# EAGLE board Proiect v104 (EAGLE 9.7.0)
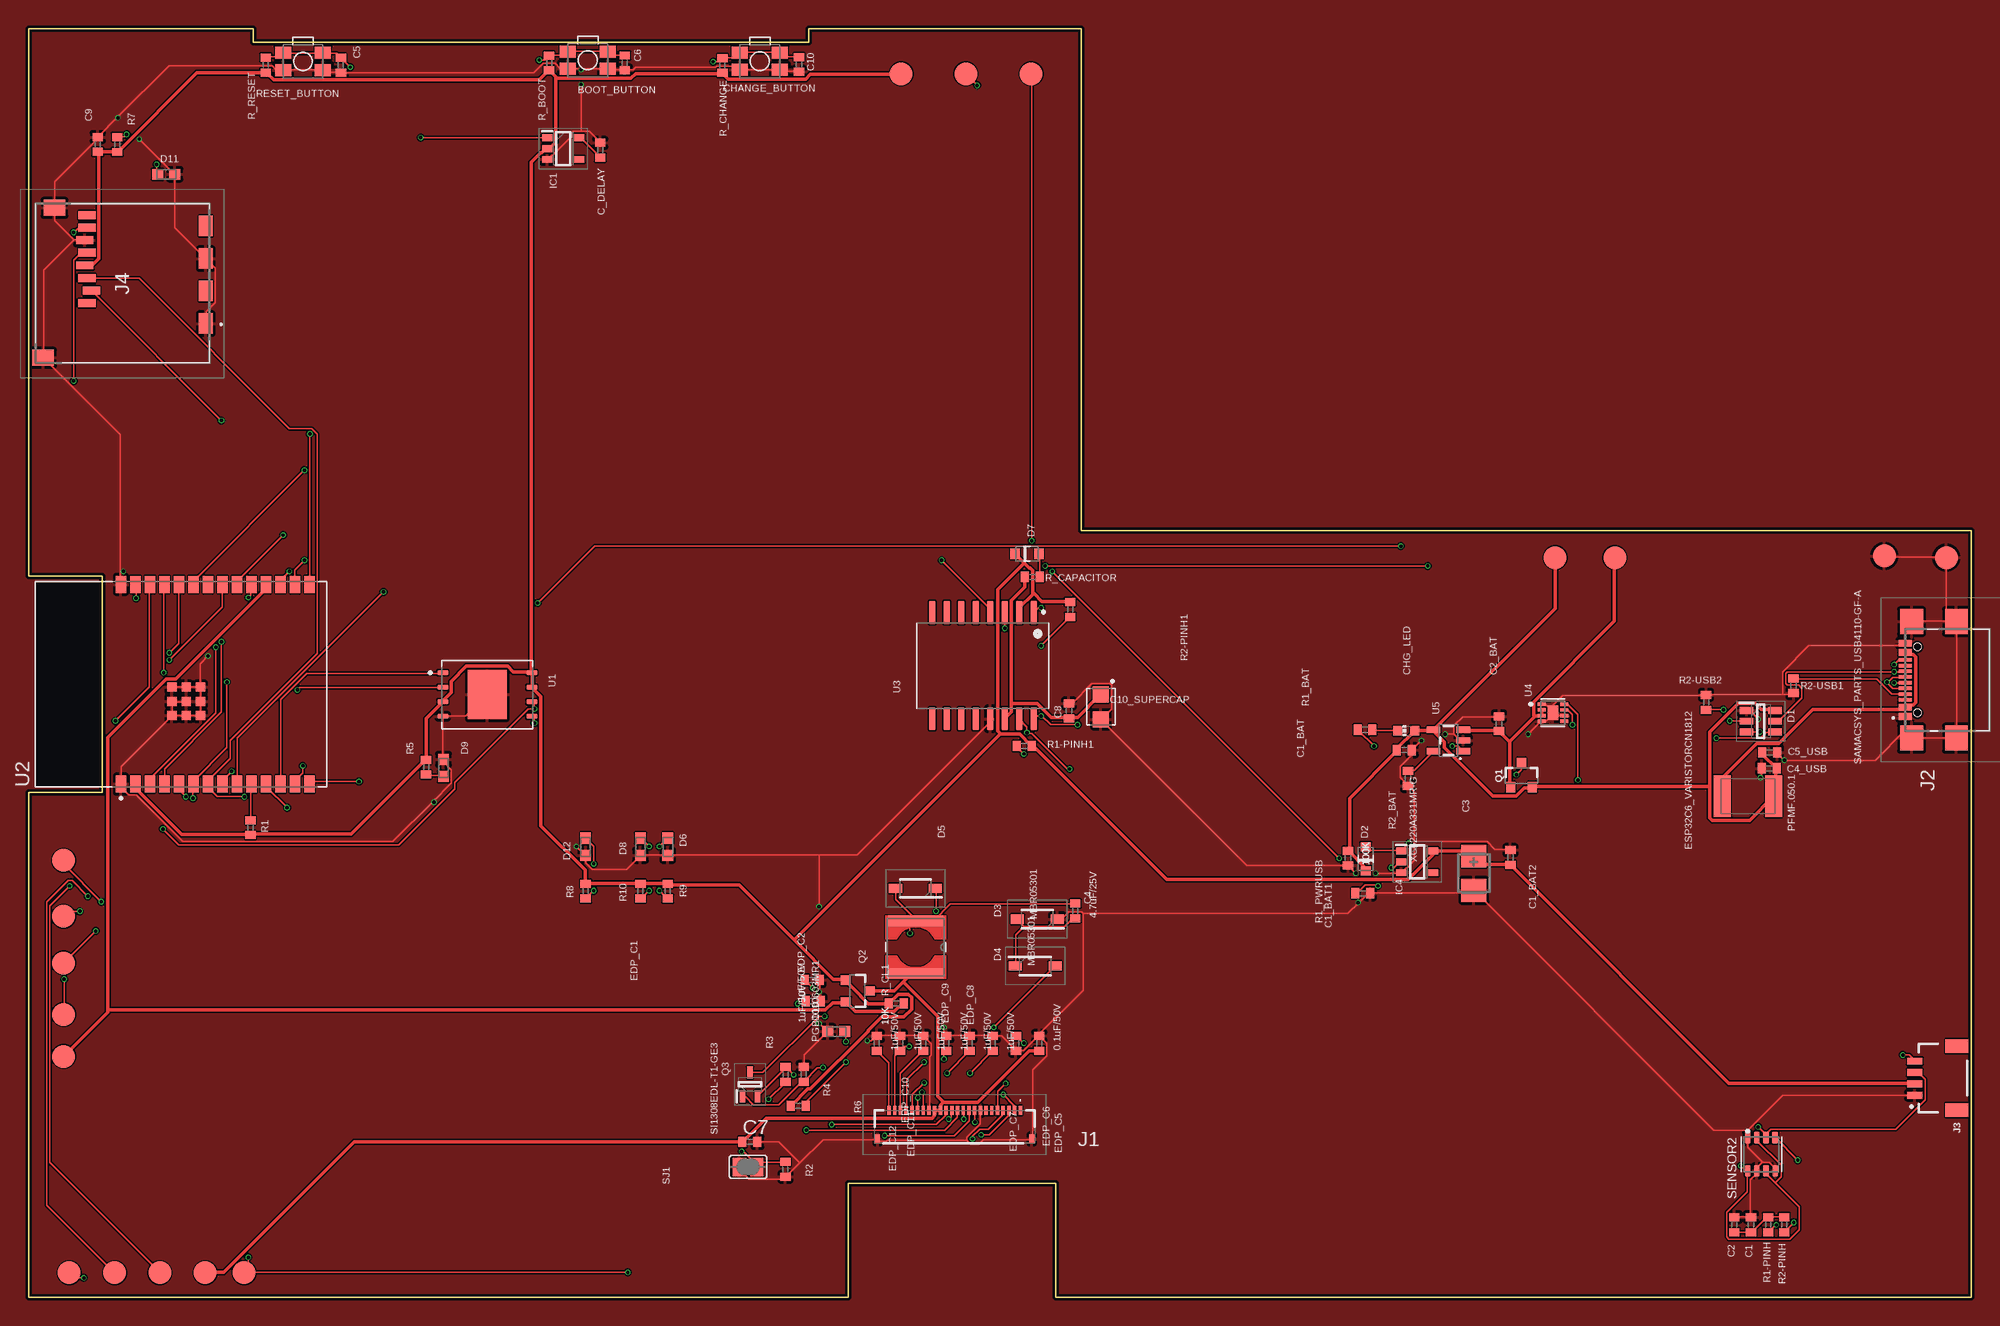
[diagram p0: board, top side]
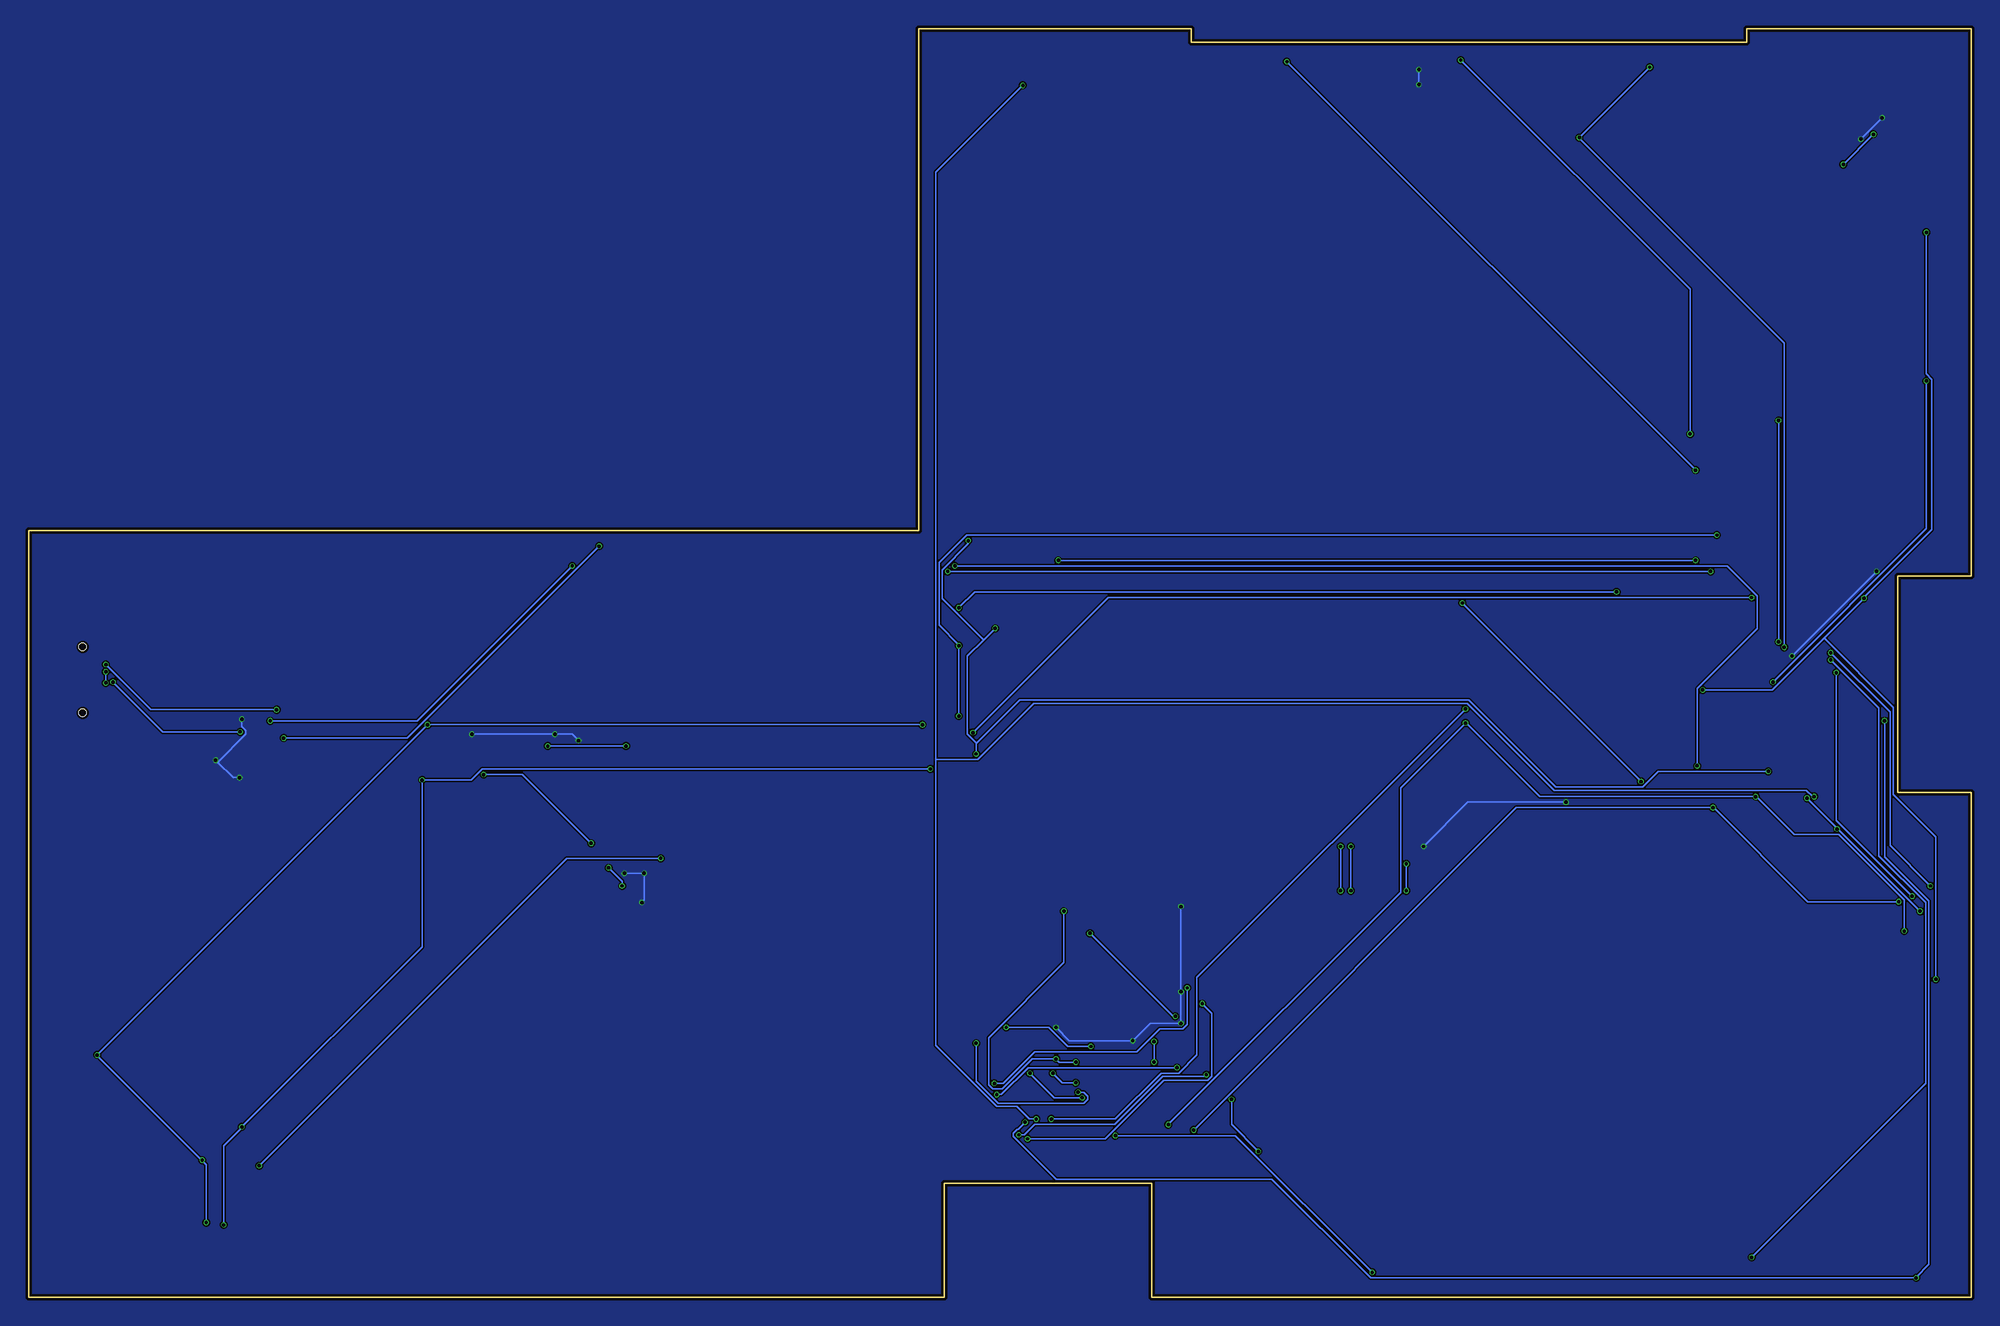
[diagram p1: board, bottom side, seen from below]

Size 170.2 x 111.2 mm. Coordinates in mm from the lower left corner, seen from the top.
Outline: 0,111.2 0,63.22 6.48,63.22 6.48,44.25 0,44.25 0,0 71.8,0 71.8,10 90,10 90,0 170.2,0 170.2,67.2 92.2,67.2 92.2,111.2 68.33,111.2 68.33,109.99 19.68,109.99 19.68,111.2 0,111.2
Copper layers (1*16): Top 0.035mm / dielectric 1.6mm / Bottom 0.035mm
Design rules "jlcpcb-2layers.dru": minimum track width 0.15mm, minimum drill 0.3mm, track to track 5mil, track to pad 5mil, pad to pad 5mil, via to via 5mil, smd to smd 5mil, copper to edge 0.2mm, drill to drill 6mil, minimum pad ring 10mil, minimum via ring 3mil, stop-mask expansion 4mil, vias tented up to drill 0mil, thermal gap 10mil
Net classes: 2 POWER: width 0.3 mm

## Footprints (pad centres in the part's own frame; a part is rotated, then mirrored left to right if it is on the bottom)
MYBUTTON = smd 1.4 x 1.05: 1 1.75,0.75; 2 -1.75,0.75; 3 -1.75,-0.75; 4 1.75,-0.75
ESP32_WROVER_EAGLE-LTSPICE_C0402 = smd 0.7 x 0.9: 1 -0.65,0; 2 0.65,0
RCL_CT3528 = smd 2 x 2.2: + -1.5,0; - 1.5,0
CAPCP3225X100N = smd 1.4 x 1.4: 1 -1.1,0; 2 1.1,0
ADAFRUIT_CHIP-LED0603 = smd 0.8 x 0.8: A 0,-0.75; C 0,0.75
SOT95P280X145-6N = smd 1.2 x 0.6: 1 -1.25,0.95; 2 -1.25,0; 3 -1.25,-0.95; 4 1.25,-0.95; 5 1.25,0; 6 1.25,0.95
ESP32_WROVER_AVX---SD0805S020S1R0_AVX_SD0805S020S1R0_0 = smd 0.8 x 0.9: 1 -1.05,0; 2 1.05,0
SOD3716X135N = smd 1.15 x 0.8: 1 -1.75,0; 2 1.75,0
DIOC1608X36N = smd 0.97 x 0.94: 1 -0.75,0; 2 0.75,0
SOT95P280X125-5N = smd 0.9 x 0.6: 1 -1.4,0.95; 2 -1.4,0; 3 -1.4,-0.95; 4 1.4,-0.95; 5 1.4,0.95
SOT95P280X120-5N = smd 0.9 x 0.6: 1 -1.4,0.95; 2 -1.4,0; 3 -1.4,-0.95; 4 1.4,-0.95; 5 1.4,0.95
FH34SRJ24S05SH99 = smd 0.3 x 0.8: 1 5.75,1.45; 2 5.25,1.45; 3 4.75,1.45; 4 4.25,1.45; 5 3.75,1.45; 6 3.25,1.45; 7 2.75,1.45; 8 2.25,1.45; 9 1.75,1.45; 10 1.25,1.45; 11 0.75,1.45; 12 0.25,1.45; 13 -0.25,1.45; 14 -0.75,1.45; 15 -1.25,1.45; 16 -1.75,1.45; 17 -2.25,1.45; 18 -2.75,1.45; 19 -3.25,1.45; 20 -3.75,1.45; 21 -4.25,1.45; 22 -4.75,1.45; 23 -5.25,1.45; 24 -5.75,1.45 | smd 0.4 x 0.8: MP1 6.75,-1.05; MP2 -6.75,-1.05
SAMACSYS_PARTS_USB4110GFA = smd 0.3 x 1.15: A1 -3.35,3.678; A4 -2.55,3.678; A5 -1.25,3.678; A6 -0.25,3.678; A7 0.25,3.678; A8 1.25,3.678; A9 2.55,3.678; A12 3.35,3.678; B1 3.05,3.678; B4 2.25,3.678; B5 1.75,3.678; B6 0.75,3.678; B7 -0.75,3.678; B8 -1.75,3.678; B9 -2.25,3.678; B12 -3.05,3.678 | smd 2.18 x 2: MP1 -5.11,-0.827; MP2 5.11,-0.827; MP3 -5.11,3.103; MP4 5.11,3.103 | hole 0.65: -2.89,2.603; 2.89,2.603
JST04_1MM_RA = smd 0.6 x 1.35: 1 -1.5,0; 2 -0.5,0; 3 0.5,0; 4 1.5,0 | smd 1.2 x 2: NC1 2.8,-3.675; NC2 -2.8,-3.675
112ATAARR03ATTEND = smd 1.8 x 1.2: G1 10.6,10.4; G2 4.9,10.4; S1 7.75,10.4; S2 2.05,10.4 | smd 1.4 x 1.9: G3 13.6,-3.85; G4 0.45,-2.85 | smd 0.7 x 1.5: P1 8.8,0; P2 7.7,0.4; P3 6.6,0; P4 5.5,-0.2; P5 4.4,0; P6 3.3,-0.2; P7 2.2,0; P8 1.1,0
IND_4828-WE-TPC_WRE = smd 0.889 x 4.826: 1 -2.286,0; 2 2.286,0
ESP32C6_VARISTOR_CT/CN1812 = smd 1.5 x 3.6: 1 -2.25,0; 2 2.25,0
ESP32_WROVER_SPARKFUN-DISCRETESEMI_SOT23-3 = smd 0.8 x 0.9: 1 -0.95,-1; 2 0.95,-1; 3 0,1.1
SOT65P210X110-3N = smd 1.05 x 0.5: 1 -1.05,0.65; 2 -1.05,-0.65; 3 1.05,0
ESP32_WROVER_EAGLE-LTSPICE_R0402 = smd 0.7 x 0.9: 1 -0.65,0; 2 0.65,0
ESP32_WROVER_BME680_PSON80P300X300X100-8N = smd 1.016 x 0.5: 1 1.458,1.2; 2 1.458,0.4; 3 1.458,-0.4; 4 1.458,-1.2; 5 -1.458,-1.22; 6 -1.458,-0.4; 7 -1.458,0.4; 8 -1.458,1.2
SJ = smd 1.168 x 1.6: 1 -0.762,0; 2 0.762,0
TP20R = smd 2 x 2: 3V3 0,0
SON127P600X800X80-9N = smd 0.94 x 0.44: 1 -3.895,1.905; 2 -3.895,0.635; 3 -3.895,-0.635; 4 -3.895,-1.905; 5 3.895,-1.905; 6 3.895,-0.635; 7 3.895,0.635; 8 3.895,1.905 | smd 3.4 x 4.3: 9 0,0
XCVR_ESP32-C6-WROOM-1-N8 = smd 1.5 x 0.9: 1 -8.75,5.26; 2 -8.75,3.99; 3 -8.75,2.72; 4 -8.75,1.45; 5 -8.75,0.18; 6 -8.75,-1.09; 7 -8.75,-2.36; 8 -8.75,-3.63; 9 -8.75,-4.9; 10 -8.75,-6.17; 11 -8.75,-7.44; 12 -8.75,-8.71; 13 -8.75,-9.98; 14 -8.75,-11.25; 15 8.75,-11.25; 16 8.75,-9.98; 17 8.75,-8.71; 18 8.75,-7.44; 19 8.75,-6.17; 20 8.75,-4.9; 21 8.75,-3.63; 22 8.75,-2.36; 23 8.75,-1.09; 24 8.75,0.18; 25 8.75,1.45; 26 8.75,2.72; 27 8.75,3.99; 28 8.75,5.26 | smd 0.8 x 0.8: 29_1 -2.755,0.79; 29_2 -1.505,0.79; 29_3 -0.255,0.79; 29_4 -2.755,-0.46; 29_5 -1.505,-0.46; 29_6 -0.255,-0.46; 29_7 -2.755,-1.71; 29_8 -1.505,-1.71; 29_9 -0.255,-1.71
SOIC127P1032X265-16N = smd 2.05 x 0.59: 1 -4.655,4.445; 2 -4.655,3.175; 3 -4.655,1.905; 4 -4.655,0.635; 5 -4.655,-0.635; 6 -4.655,-1.905; 7 -4.655,-3.175; 8 -4.655,-4.445; 9 4.655,-4.445; 10 4.655,-3.175; 11 4.655,-1.905; 12 4.655,-0.635; 13 4.655,0.635; 14 4.655,1.905; 15 4.655,3.175; 16 4.655,4.445
SON50P200X200X80-9N = smd 0.762 x 0.3: 1 -0.985,0.75 | smd 0.76 x 0.3: 2 -0.985,0.25; 3 -0.985,-0.25; 4 -0.985,-0.75; 6 0.985,-0.25 | smd 0.76 x 0.27: 5 0.985,-0.75; 7 0.985,0.25; 8 0.985,0.75 | smd 0.9 x 1.3: 9 0,0
ESP32_WROVER_SPARKFUN-IC-POWER_SOT23-5 = smd 0.55 x 1.2: 1 -0.95,-1.3; 2 0,-1.3; 3 0.95,-1.3; 4 0.95,1.3; 5 -0.95,1.3

## Placement (x,y rotation side)
BOOT_BUTTON  BUTTON_CUSYOMV1  [MYBUTTON]  49,108.43 180 top
C1  100nF  [ESP32_WROVER_EAGLE-LTSPICE_C0402]  150.89,6.38 90 top
C1_BAT  4.7uF  [ESP32_WROVER_EAGLE-LTSPICE_C0402]  120.52,47.96 0 top
C1_BAT1  4.7uF  [ESP32_WROVER_EAGLE-LTSPICE_C0402]  116.88,35.42 0 top
C1_BAT2  4.7uF  [ESP32_WROVER_EAGLE-LTSPICE_C0402]  129.82,38.56 90 top
C2  100nF  [ESP32_WROVER_EAGLE-LTSPICE_C0402]  149.42,6.38 90 top
C2_BAT  4.7uF  [ESP32_WROVER_EAGLE-LTSPICE_C0402]  128.82,50.28 90 top
C3  100uF TANT  [RCL_CT3528]  126.61,37.17 270 top
C4  4.7uF/25V  [ESP32_WROVER_EAGLE-LTSPICE_C0402]  91.69,33.88 90 top
C4_USB  100nF  [ESP32_WROVER_EAGLE-LTSPICE_C0402]  152.49,46.37 180 top
C5  1uF  [ESP32_WROVER_EAGLE-LTSPICE_C0402]  27.36,107.99 270 top
C5_USB  4.7uF  [ESP32_WROVER_EAGLE-LTSPICE_C0402]  152.52,47.77 0 top
C6  1uF  [ESP32_WROVER_EAGLE-LTSPICE_C0402]  52.22,108.19 270 top
C7  10uF  [ESP32_WROVER_EAGLE-LTSPICE_C0402]  63.19,13.64 0 top
C8  100nF  [ESP32_WROVER_EAGLE-LTSPICE_C0402]  91.14,51.4 90 top
C9  100nF  [ESP32_WROVER_EAGLE-LTSPICE_C0402]  6.06,101.04 90 top
C10  1uF  [ESP32_WROVER_EAGLE-LTSPICE_C0402]  67.49,108.05 270 top
C10_SUPERCAP  CPH3225A  [CAPCP3225X100N]  93.94,51.76 270 top
C_DELAY  100nF  [ESP32_WROVER_EAGLE-LTSPICE_C0402]  50.09,100.54 90 top
CHANGE_BUTTON  BUTTON_CUSYOMV1  [MYBUTTON]  64.07,108.33 180 top
CHG_LED  1  [ADAFRUIT_CHIP-LED0603]  120.69,49.66 90 top
D1  USBLC6-2SC6Y1  [SOT95P280X145-6N]  151.75,50.5 0 top
D2  ESP32_WROVER_AVX---SD0805S020S1R0_AVX_SD0805S020S1R0_0_0  [ESP32_WROVER_AVX---SD0805S020S1R0_AVX_SD0805S020S1R0_0]  117.15,38.44 90 top
D3  MBR05301  [SOD3716X135N]  88.37,33.15 180 top
D4  MBR05301  [SOD3716X135N]  88.18,29.05 0 top
D5  MBR05301  [SOD3716X135N]  77.69,35.86 180 top
D6  PGB1010603MR1  [DIOC1608X36N]  56,39.5 90 top
D7  SD805S020S1R0  [ESP32_WROVER_AVX---SD0805S020S1R0_AVX_SD0805S020S1R0_0]  87.47,65.17 0 top
D8  PGB1010603MR1  [DIOC1608X36N]  53.6,39.5 90 top
D9  PGB1010603MR1  [DIOC1608X36N]  36.34,46.39 270 top
D10  PGB1010603MR1  [DIOC1608X36N]  70.76,23.31 0 top
D11  PGB1010603MR1  [DIOC1608X36N]  12.06,98.43 180 top
D12  PGB1010603MR1  [DIOC1608X36N]  48.8,39.5 90 top
EDP_C1  1uF/50V  [ESP32_WROVER_EAGLE-LTSPICE_C0402]  68.74,25.97 0 top
EDP_C2  1uF/50V  [ESP32_WROVER_EAGLE-LTSPICE_C0402]  68.66,27.83 0 top
EDP_C5  0.1uF/50V  [ESP32_WROVER_EAGLE-LTSPICE_C0402]  88.53,22.27 90 top
EDP_C6  1uF/50V  [ESP32_WROVER_EAGLE-LTSPICE_C0402]  86.5,22.27 270 top
EDP_C7  1uF/50V  [ESP32_WROVER_EAGLE-LTSPICE_C0402]  84.47,22.27 90 top
EDP_C8  1uF/50V  [ESP32_WROVER_EAGLE-LTSPICE_C0402]  82.43,22.27 90 top
EDP_C9  1uF/50V  [ESP32_WROVER_EAGLE-LTSPICE_C0402]  80.4,22.27 90 top
EDP_C10  1uF/50V  [ESP32_WROVER_EAGLE-LTSPICE_C0402]  78.37,22.27 90 top
EDP_C11  1uF/50V  [ESP32_WROVER_EAGLE-LTSPICE_C0402]  76.34,22.27 90 top
EDP_C12  1uF/50V  [ESP32_WROVER_EAGLE-LTSPICE_C0402]  74.3,22.27 90 top
IC1  BD5229G-TR  [SOT95P280X125-5N]  46.84,100.68 0 top
IC4  XC6220A331MR-G  [SOT95P280X120-5N]  121.65,38.18 0 top
J1  FH34SRJ-24S-0.5SH_99_  [FH34SRJ24S05SH99]  81.13,14.94 0 top
J2  SAMACSYS_PARTS_USB4110-GF-A  [SAMACSYS_PARTS_USB4110GFA]  168.06,54.13 90 top
J3  QWIIC_RIGHT_ANGLE  [JST04_1MM_RA]  165.23,19.21 90 top
J4  112A-TAAR-R03_ATTEND  [112ATAARR03ATTEND]  5.12,95.94 270 top
L1  68uH  [IND_4828-WE-TPC_WRE]  77.72,30.7 270 top
PFMF.050.1  ESP32C6_VARISTORCN1812  [ESP32C6_VARISTOR_CT/CN1812]  150.62,43.93 0 top
Q1  20V/4.2A/52mΩ/1.4W  [ESP32_WROVER_SPARKFUN-DISCRETESEMI_SOT23-3]  130.78,45.72 0 top
Q2  20V/4.2A/52mΩ/1.4W  [ESP32_WROVER_SPARKFUN-DISCRETESEMI_SOT23-3]  72.59,26.85 270 top
Q3  SI1308EDL-T1-GE3  [SOT65P210X110-3N]  63.2,18.67 90 top
R1  10K  [ESP32_WROVER_EAGLE-LTSPICE_R0402]  19.44,41.16 90 top
R1-PINH  10K  [ESP32_WROVER_EAGLE-LTSPICE_R0402]  152.39,6.38 90 top
R1-PINH1  10K  [ESP32_WROVER_EAGLE-LTSPICE_R0402]  87.22,48.33 0 top
R1_BAT  200  [ESP32_WROVER_EAGLE-LTSPICE_R0402]  117.07,49.75 0 top
R1_PWRUSB  100K  [ESP32_WROVER_EAGLE-LTSPICE_R0402]  115.59,38.5 90 top
R2  2.2  [ESP32_WROVER_EAGLE-LTSPICE_R0402]  66.3,11.22 90 top
R2-PINH  10K  [ESP32_WROVER_EAGLE-LTSPICE_R0402]  153.79,6.38 90 top
R2-PINH1  10K  [ESP32_WROVER_EAGLE-LTSPICE_R0402]  91.24,60.3 90 top
R2-USB1  5k1  [ESP32_WROVER_EAGLE-LTSPICE_R0402]  154.61,53.6 90 top
R2-USB2  5k1  [ESP32_WROVER_EAGLE-LTSPICE_R0402]  146.95,52.15 90 top
R2_BAT  2K  [ESP32_WROVER_EAGLE-LTSPICE_R0402]  120.84,45.48 90 top
R3  0.47  [ESP32_WROVER_EAGLE-LTSPICE_R0402]  66.32,19.54 90 top
R4  10K  [ESP32_WROVER_EAGLE-LTSPICE_R0402]  67.9,19.55 90 top
R5  10K  [ESP32_WROVER_EAGLE-LTSPICE_R0402]  34.83,46.46 90 top
R6  10K  [ESP32_WROVER_EAGLE-LTSPICE_R0402]  67.43,16.79 180 top
R7  10K  [ESP32_WROVER_EAGLE-LTSPICE_R0402]  7.78,101.03 270 top
R8  10K  [ESP32_WROVER_EAGLE-LTSPICE_R0402]  48.8,35.6 90 top
R9  10K  [ESP32_WROVER_EAGLE-LTSPICE_R0402]  56,35.6 90 top
R10  10K  [ESP32_WROVER_EAGLE-LTSPICE_R0402]  53.6,35.6 90 top
R_BOOT  10K  [ESP32_WROVER_EAGLE-LTSPICE_R0402]  45.6,108.18 90 top
R_CAPACITOR  15  [ESP32_WROVER_EAGLE-LTSPICE_R0402]  87.94,63.15 0 top
R_CHANGE  10K  [ESP32_WROVER_EAGLE-LTSPICE_R0402]  60.79,107.97 90 top
R_CL1  10K  [ESP32_WROVER_EAGLE-LTSPICE_R0402]  76.01,25.78 0 top
R_RESET  10K  [ESP32_WROVER_EAGLE-LTSPICE_R0402]  20.78,107.99 90 top
RESET_BUTTON  BUTTON_CUSYOMV1  [MYBUTTON]  24.04,108.32 180 top
SENSOR2  BME688  [ESP32_WROVER_BME680_PSON80P300X300X100-8N]  151.8,12.55 90 top
SJ1  1  [SJ]  63.03,11.44 0 top
TP1  TP  [TP20R]  7.54,2.17 0 top
TP2  TP  [TP20R]  11.51,2.17 0 top
TP3  TP  [TP20R]  138.97,64.84 0 top
TP4  TP  [TP20R]  162.58,64.98 0 top
TP5  TP  [TP20R]  168,64.84 0 top
TP6  TP  [TP20R]  3.07,24.8 0 top
TP7  TP  [TP20R]  3.07,29.3 0 top
TP8  TP  [TP20R]  3.07,33.4 0 top
TP9  TP  [TP20R]  3.56,2.17 0 top
TP10  TP  [TP20R]  3.07,38.3 0 top
TP11  TP  [TP20R]  82.1,107.22 0 top
TP12  TP  [TP20R]  18.89,2.17 0 top
TP13  TP  [TP20R]  3.07,21.12 0 top
TP14  TP  [TP20R]  133.74,64.84 0 top
TP15  TP  [TP20R]  87.82,107.22 0 top
TP16  TP  [TP20R]  76.44,107.22 0 top
TP17  TP  [TP20R]  15.47,2.17 0 top
U1  W25Q512JVEIQ  [SON127P600X800X80-9N]  40.19,52.84 0 top
U2  ESP32-C6-WROOM-1-N8  [XCVR_ESP32-C6-WROOM-1-N8]  13.36,53.74 90 top
U3  DS3231SN#  [SOIC127P1032X265-16N]  83.59,55.37 270 top
U4  MAX17048G+T10  [SON50P200X200X80-9N]  133.54,51.24 0 top
U5  MCP73831  [ESP32_WROVER_SPARKFUN-IC-POWER_SOT23-5]  124.39,48.81 90 top

## Library data of the parts
BOOT_BUTTON C1 C1_BAT C1_BAT1 C1_BAT2 C2 C2_BAT C4 C4_USB C5 C5_USB C6-C10 C_DELAY CHANGE_BUTTON CHG_LED D1-D12 EDP_C1 EDP_C2 EDP_C5-EDP_C12 PFMF.050.1 Q1 Q2 R1 R1-PINH R1-PINH1 R1_BAT R1_PWRUSB R2 R2-PINH R2-PINH1 R2-USB1 R2-USB2 R2_BAT R3-R10 R_BOOT R_CAPACITOR R_CHANGE R_CL1 R_RESET RESET_BUTTON SJ1 TP1-TP17 = DeskAssistant v19 v1
C3 = DeskAssistant v19 v1; SPICEPREFIX: C
C10_SUPERCAP = DeskAssistant v19 v1; AVAILABILITY: Not in stock; CHECK_PRICES: https://www.snapeda.com/parts/CPH3225A/Seiko+Instruments/view-part/?ref=eda; DESCRIPTION: 11 mF (EDLC) Supercapacitor 3.3 V 1210 (3225 Metric) - -; MF: Seiko Instruments; MP: CPH3225A; PACKAGE: 1210 Seiko; PRICE: None; PURCHASE-URL: https://www.snapeda.com/api/url_track_click_mouser/?unipart_id=562593&manufacturer=Seiko Instruments&part_name=CPH3225A&search_term=None; SNAPEDA_LINK: https://www.snapeda.com/parts/CPH3225A/Seiko+Instruments/view-part/?ref=snap
IC1 = DeskAssistant v19 v1; DESCRIPTION: Voltage Detector with Adjustable Delay Time: CMOS processes are utilized to develop high precision, low current consumption CMOS reset ICs that allow arbitrary setting of the delay time. The extensive lineup includes both Nch Open Drain and CMOS output types in a wide range of detection voltages (from 2.3V to 6.0V, in 0.1V steps), enabling selection of the ideal solution based on customer requirements. In addition, the entire series is of course both lead-free and RoHS-compliant.; HEIGHT: 1.25mm; MANUFACTURER_NAME: ROHM Semiconductor; MANUFACTURER_PART_NUMBER: BD5229G-TR; MOUSER_PART_NUMBER: 755-BD5229G-TR; MOUSER_PRICE-STOCK: https://www.mouser.co.uk/ProductDetail/ROHM-Semiconductor/BD5229G-TR?qs=4kLU8WoGk0vvnhrrYwdszw%3D%3D
IC4 = DeskAssistant v19 v1; DESCRIPTION: LDO Voltage Regulators; HEIGHT: 1.2mm; MANUFACTURER_NAME: Torex; MANUFACTURER_PART_NUMBER: XC6220A331MR-G; MOUSER_PART_NUMBER: 865-XC6220A331MR-G; MOUSER_PRICE-STOCK: https://www.mouser.co.uk/ProductDetail/Torex-Semiconductor/XC6220A331MR-G?qs=AsjdqWjXhJ8ZSWznL1J0gg%3D%3D
J1 = DeskAssistant v19 v1; DESCRIPTION: 24 Position FFC, FPC Connector Contacts, Top and Bottom 0.020" (0.50mm) Surface Mount, Right Angle; HEIGHT: 1.1mm; MANUFACTURER_NAME: Hirose; MANUFACTURER_PART_NUMBER: FH34SRJ-24S-0.5SH(99); MOUSER_PART_NUMBER: 798-FH34SRJ24S05SH99; MOUSER_PRICE-STOCK: https://www.mouser.co.uk/ProductDetail/Hirose-Connector/FH34SRJ-24S-0.5SH99?qs=vcbW%252B4%252BSTIpKBl5ap9J8Fw%3D%3D
J2 = DeskAssistant v19 v1; DESCRIPTION: CONN USB 2.0 TYPE-C R/A SMT; HEIGHT: 3.26mm; MANUFACTURER_NAME: GCT (GLOBAL CONNECTOR TECHNOLOGY); MANUFACTURER_PART_NUMBER: USB4110-GF-A; MOUSER_PART_NUMBER: 640-USB4110-GF-A; MOUSER_PRICE-STOCK: https://www.mouser.co.uk/ProductDetail/GCT/USB4110-GF-A?qs=KUoIvG%2F9IlYiZvIXQjyJeA%3D%3D
J3 = DeskAssistant v19 v1; PROD_ID: CONN-13694
J4 = DeskAssistant v19 v1; DESCRIPTION: Micro SD Card Socket, Push-Push Type, Top Mount, SMT, H=1.83mm, 10u; HEIGHT: 1.9mm; MANUFACTURER_NAME: ATTEND; MANUFACTURER_PART_NUMBER: 112A-TAAR-R03 ATTEND
L1 = DeskAssistant v19 v1; COPYRIGHT: Copyright (C) 2024 Ultra Librarian. All rights reserved.; MANUFACTURER_PART_NUMBER: 744043680; MFR_NAME: Wurth Electronics
Q3 = DeskAssistant v19 v1; AVAILABILITY: In Stock; CHECK_PRICES: https://www.snapeda.com/parts/SI1308EDL-T1-GE3/Vishay+Siliconix/view-part/?ref=eda; DESCRIPTION: Si1308EDL-T1-GE3 N-channel MOSFET Transistor, 1.5 A, 30 V, 3-Pin SC-70 | Siliconix / Vishay SI1308EDL-T1-GE3; MF: Vishay Siliconix; MP: SI1308EDL-T1-GE3; PACKAGE: SOT-323 Vishay Semiconductor; PRICE: None; PURCHASE-URL: https://www.snapeda.com/api/url_track_click_mouser/?unipart_id=274603&manufacturer=Vishay Siliconix&part_name=SI1308EDL-T1-GE3&search_term=None; SNAPEDA_LINK: https://www.snapeda.com/parts/SI1308EDL-T1-GE3/Vishay+Siliconix/view-part/?ref=snap
SENSOR2 = DeskAssistant v19 v1; AVAILABILITY: Unavailable; DESCRIPTION: Integrated Environmental Unit; MF: Bosch Sensortec; MP: BME680; PACKAGE: LGA-8 Bosch Tools; PRICE: None
U1 = DeskAssistant v19 v1; AVAILABILITY: In Stock; CHECK_PRICES: https://www.snapeda.com/parts/W25Q512JVEIQ/Winbond+Electronics/view-part/?ref=eda; DESCRIPTION: FLASH - NOR Memory IC 512Mb (64M x 8) SPI - Quad I/O 133 MHz 8-WSON (8x6); MF: Winbond Electronics; MP: W25Q512JVEIQ; PACKAGE: Package; PRICE: None; SNAPEDA_LINK: https://www.snapeda.com/parts/W25Q512JVEIQ/Winbond+Electronics/view-part/?ref=snap
U2 = DeskAssistant v19 v1; AVAILABILITY: In Stock; CHECK_PRICES: https://www.snapeda.com/parts/ESP32-C6-WROOM-1-N8/Espressif+Systems/view-part/?ref=eda; DESCRIPTION: Multiprotocol Modules ESP32-C6 module, Wi-Fi 6 in 2.4 GHz band, Bluetooth 5, Zigbee 3.0 and Thread. ESP34-WROOM Compatible - ENGINEERING SAMPLE; MF: Espressif Systems; MP: ESP32-C6-WROOM-1-N8; PACKAGE: None; PRICE: None; SNAPEDA_LINK: https://www.snapeda.com/parts/ESP32-C6-WROOM-1-N8/Espressif+Systems/view-part/?ref=snap
U3 = DeskAssistant v19 v1; AVAILABILITY: In Stock; CHECK_PRICES: https://www.snapeda.com/parts/DS3231SN%23/Analog+Devices/view-part/?ref=eda; DESCRIPTION: Extremely Accurate I²C-Integrated RTC/TCXO/Crystal; MF: Analog Devices; MP: DS3231SN#; PACKAGE: SOIC-16 Maxim; PRICE: None; PURCHASE-URL: https://www.snapeda.com/api/url_track_click_mouser/?unipart_id=99048&manufacturer=Analog Devices&part_name=DS3231SN#&search_term=None; SNAPEDA_LINK: https://www.snapeda.com/parts/DS3231SN%23/Analog+Devices/view-part/?ref=snap
U4 = DeskAssistant v19 v1; AVAILABILITY: In Stock; CHECK_PRICES: https://www.snapeda.com/parts/MAX17048G+T10/Analog+Devices/view-part/?ref=eda; DESCRIPTION: 3µA 1-Cell/2-Cell Fuel Gauge with ModelGauge; MF: Analog Devices; MP: MAX17048G+T10; PACKAGE: TDFN-8 Maxim; PRICE: None; PURCHASE-URL: https://www.snapeda.com/api/url_track_click_mouser/?unipart_id=329239&manufacturer=Analog Devices&part_name=MAX17048G+T10&search_term=None; SNAPEDA_LINK: https://www.snapeda.com/parts/MAX17048G+T10/Analog+Devices/view-part/?ref=snap
U5 = DeskAssistant v19 v1; PROD_ID: IC-09995

## Nets
3V3 [POWER]: C1_BAT2.1 C3.+ C9.1 D7.1 IC1.2 IC4.5 J3.2 J4.P4 Q2.1 R1-PINH1.2 R1.1 R2-PINH1.2 R5.2 R6.2 R7.2 R8.2 R9.2 R10.2 R_BOOT.1 R_CHANGE.1 R_CL1.1 R_RESET.1 TP16.3V3 U1.3 U1.7 U1.8 U2.2 U3.2
12C_PW: C1.1 C2.1 R1-PINH.2 R2-PINH.2
32KHZ: U2.9 U3.1
DN: D1.3 J2.A7 J2.B7
DP: D1.5 J2.A6 J2.B6
EPD_3V3 [POWER]: C7.1 EDP_C5.1 J1.15 J1.16 L1.2 Q2.3 TP17.3V3
EPD_3V3_C [POWER]: Q2.2 R_CL1.2 TP13.3V3 U2.18
EPD_BUSY: J1.9 TP9.3V3 U2.26
EPD_CS: J1.12 TP10.3V3 U2.11
EPD_DC: J1.11 TP11.3V3 U2.5
EPD_RST: J1.10 TP12.3V3 U2.21
FLASH_CS: U1.1 U2.12
GDR: J1.2 Q3.1 R4.1
GND: BOOT_BUTTON.1 BOOT_BUTTON.2 C1.2 C1_BAT1.2 C1_BAT2.2 C1_BAT.2 C2.2 C2_BAT.2 C3.- C4_USB.2 C5.2 C5_USB.2 C6.2 C7.2 C8.2 C9.2 C10.2 C10_SUPERCAP.2 C_DELAY.2 CHANGE_BUTTON.1 CHANGE_BUTTON.2 D1.1 D3.1 D6.1 D8.1 D9.1 D10.1 D11.1 D12.1 EDP_C1.2 EDP_C2.2 EDP_C5.2 EDP_C6.2 EDP_C7.2 EDP_C8.2 EDP_C9.2 EDP_C10.2 EDP_C11.2 EDP_C12.2 IC1.3 IC4.3 J1.8 J1.17 J1.MP1 J1.MP2 J2.A1 J2.A12 J2.B1 J2.B12 J2.MP1 J2.MP2 J2.MP3 J2.MP4 J3.1 J4.G1 J4.G2 J4.G3 J4.G4 J4.P6 R1_PWRUSB.1 R2-USB1.1 R2-USB2.2 R2.1 R2_BAT.1 R4.2 RESET_BUTTON.1 RESET_BUTTON.2 SENSOR2.1 SENSOR2.5 SENSOR2.7 SJ1.1 TP4.3V3 TP5.3V3 U1.4 U1.9 U2.1 U2.28 U2.29_1 U2.29_2 U2.29_3 U2.29_4 U2.29_5 U2.29_6 U2.29_7 U2.29_8 U2.29_9 U3.13 U4.1 U4.4 U4.6 U4.9 U5.2
GPIO8: R1.2 U2.10
I2C_PW: SENSOR2.2 SENSOR2.6 SENSOR2.8 U2.17
INT_RTC: R1-PINH1.1 TP15.3V3 U2.8 U3.3
IO/BOOT: BOOT_BUTTON.3 BOOT_BUTTON.4 C6.1 R_BOOT.2 U2.15
IO/CHANGE: C10.1 CHANGE_BUTTON.3 CHANGE_BUTTON.4 R_CHANGE.2 U2.23
MISO: J4.P7 TP6.3V3 U1.2 U2.27
MOSI: J1.14 J4.P3 TP7.3V3 U1.5 U2.7
N$1: J2.A5 R2-USB1.2
N$3: J2.B5 R2-USB2.1
N$4: C4.1 D3.2 D4.1
N$5: EDP_C1.1 J1.4
N$6: EDP_C2.1 J1.5
N$7: EDP_C6.1 J1.18
N$8: EDP_C7.1 J1.19
N$9: EDP_C8.1 J1.20
N$10: C1_BAT1.1 IC4.2
N$11: EDP_C10.1 J1.22
N$12: D2.2 IC4.1 Q1.3
N$13: C_DELAY.1 IC1.5
N$14: R1_BAT.1 U5.1
N$15: CHG_LED.C R1_BAT.2
N$16: D7.2 R_CAPACITOR.2
N$17: EDP_C12.1 J1.24
N$18: R2_BAT.2 U5.5
N$19: D12.2 R8.1
N$21: D10.2 R6.1
N$22: D11.2 R7.1
N$23: D9.2 R5.1
N$25: D6.2 R9.1
N$26: D8.2 R10.1
PREVGH: D5.1 EDP_C9.1 J1.21
PREVGL: D4.2 EDP_C11.1 J1.23
RESE: J1.3 Q3.2 R3.2
RESE': R2.2 R3.1 SJ1.2
RESET: C5.1 IC1.1 R_RESET.2 RESET_BUTTON.3 RESET_BUTTON.4 U2.3
RTC_RST: U2.16 U3.4
RX: TP2.3V3 U2.24
SCK: J1.13 J4.P5 TP8.3V3 U1.6 U2.6
SCL: J3.4 R2-PINH1.1 R2-PINH.1 SENSOR2.4 U2.20 U3.16 U4.7
SDA: J3.3 R1-PINH.1 SENSOR2.3 U2.19 U3.15 U4.8
SRC: C4.2 D5.2 L1.1 Q3.3
SS_SD: J4.P2 U2.4
TX: TP1.3V3 U2.25
USB_D+: D1.4 U2.14
USB_D-: D1.2 U2.13
VBAT [POWER]: C2_BAT.1 Q1.1 TP3.3V3 U4.2 U4.3 U5.3
VBUS [POWER]: C1_BAT.1 C4_USB.1 C5_USB.1 CHG_LED.A D1.6 D2.1 PFMF.050.1.2 Q1.2 R1_PWRUSB.2 TP14.3V3 U5.4
VRTC [POWER]: C8.1 C10_SUPERCAP.1 R_CAPACITOR.1 U3.14
VUSB [POWER]: J2.A4 J2.A9 J2.B4 J2.B9 PFMF.050.1.1

## Tracks (layer width: path | path; a pad name or v marks a point on that pad's centre or on a via)
3V3
  Top 0.3: J4.P4 4.99,90.5 5.61,90.5 6.16,91.05 6.16,100.26 C9.1 6.09,100.4 7.76,100.4 R7.2 7.89,100.47 14.75,107.32 20.77,107.32 R_RESET.1 20.91,107.25 21.47,106.7 44.74,106.7 45.5,107.46 R_BOOT.1 45.64,107.53 46.19,106.98 46.19,106.84 | 46.19,106.84 46.19,101.23 45.7,100.74 45.5,100.74 IC1.2 45.29,100.67 44.94,100.33 44.87,100.33 44.04,99.5 44.04,54.97 43.97,54.83 | 46.19,106.84 52.77,106.84 53.18,107.25 60.73,107.25 R_CHANGE.1 60.87,107.18 61.29,106.77 68.07,106.77 68.49,107.18 76.38,107.18 TP16.3V3 | J3.2 165.23,18.75 148.96,18.75 129.91,37.8 C1_BAT2.1 129.77,37.93 127.42,37.93 126.73,38.63 C3.+ 126.59,38.7 126.17,39.11 123.06,39.11 IC4.5 122.99,38.97 122.99,38.77 120.84,36.62 99.72,36.62 88.02,48.32 R1-PINH1.2 87.81,48.39 86.84,49.36 85.18,49.36 | 87.22,64.35 87.67,63.9 87.74,63.9 87.95,63.69 87.95,61.69 | 87.22,64.35 86.42,65.15 D7.1 | 87.95,61.69 87.95,61.62 86.77,60.44 U3.2 | 85.18,49.36 84.9,49.64 84.9,62.03 87.22,64.35 | R2-PINH1.2 91.2,60.99 88.78,60.99 88.09,61.69 87.95,61.69 | R6.2 66.83,16.81 68.28,18.27 68.49,18.27 73.54,23.32 73.54,23.39 74.72,24.57 76.66,24.57 77.35,25.26 77.35,26.3 77.08,26.58 76.17,26.58 75.41,25.82 R_CL1.1 75.21,25.75 73.54,25.75 72.92,26.37 72.92,26.44 71.61,27.75 Q2.1 71.47,27.89 70.5,27.89 67.07,31.32 | U2.2 9.42,44.93 9.42,44.58 13.43,40.56 19.39,40.56 R1.1 19.53,40.63 28.25,40.63 34.69,47.08 R5.2 34.83,47.14 34.83,50.74 U1.3 36.36,52.34 37.05,53.03 37.05,54 38.36,55.32 41.97,55.32 42.45,54.83 43.97,54.83 | 43.97,54.83 U1.8 44.11,54.69 44.11,53.52 U1.7 44.18,53.38 44.87,52.68 44.87,41.33 48.75,37.45 48.75,36.41 R8.2 48.82,36.27 53.6,36.27 R10.2 53.74,36.27 55.95,36.27 R9.2 56.09,36.13 62.26,36.13 67.07,31.32
  Top 0.3: 67.07,31.32 85.04,49.29 85.18,49.36
12C_PW
  Top 0.15: R2-PINH.2 153.74,7.05 152.42,7.05 R1-PINH.2 152.35,6.98 152.21,6.98 150.97,5.73 C1.1 150.83,5.73 149.44,5.73 C2.1
32KHZ  (via drill 0.3)
  Top 0.15: v31.09,61.83 18.28,49.01 18.28,45 U2.9 | v88.71,60.44 88.5,60.44 88.09,60.02 U3.1
  Bottom 0.15: v31.09,61.83 87.32,61.83 v88.71,60.44
DN  (via drill 0.3)
  Top 0.15: 162.94,53.93 162.94,54 163.29,54.35 164.33,54.35 J2.A7 | 162.94,53.93 162.94,53.72 163.29,53.38 164.33,53.38 J2.B7 | v151.66,49.57 150.55,49.57 D1.3 | v162.81,53.93 162.94,53.93
  Bottom 0.15: v151.66,49.57 158.44,49.57 v162.81,53.93
DP  (via drill 0.3)
  Top 0.15: v163.43,53.86 164.33,53.86 J2.A6 | J2.B6 164.33,54.83 v163.43,54.83 154.08,54.83 153.94,54.69 153.94,53.79 154.08,53.65 155.05,53.65 155.33,53.38 155.33,52.55 153.32,50.54 153.04,50.54 D1.5
  Bottom 0.15: v163.43,54.83 v163.43,53.86
EPD_3V3
  Top 0.3: 76.62,27.65 77.35,28.38 77.7,28.38 L1.2 | 76.62,27.65 75.83,26.85 73.75,26.85 Q2.3 | 80.12,17.09 83.17,17.09 87.67,21.59 88.5,21.59 EDP_C5.1 | 80.12,17.09 79.92,16.88 79.92,16.54 J1.15 79.84,16.4 79.43,16.4 J1.16 79.36,16.26 79.36,15.91 79.15,15.7 64.61,15.7 62.6,13.7 C7.1 62.39,13.63 28.53,13.63 17.11,2.2 15.51,2.2 TP17.3V3 | 76.62,27.65 79.64,24.64 79.64,17.64 80.05,17.23 80.12,17.09
EPD_3V3_C
  Top 0.3: R_CL1.2 76.66,25.75 76.52,25.75 75.83,25.05 72.44,25.05 71.61,25.88 Q2.2 71.47,25.82 70.43,25.82 69.8,25.19 6.92,25.19 | 6.92,25.19 6.92,24.98 3.12,21.18 TP13.3V3 | 6.92,25.19 6.92,49.08 12.05,54.21 12.88,54.21 20.77,62.1 20.77,62.45 U2.18
EPD_BUSY  (via drill 0.3)
  Top 0.15: v82.89,15.36 82.89,16.33 J1.9 | v4.85,1.72 4.02,1.72 3.6,2.13 TP9.3V3 | v7.62,50.54 10.6,53.52 10.6,62.45 U2.26
  Bottom 0.15: v82.89,15.36 83.52,14.73 83.58,14.73 83.93,14.39 83.93,14.11 80.19,10.37 61.29,10.37 52.63,1.72 v4.85,1.72 4.85,1.79 3.74,2.89 3.74,34.75 7.62,38.63 v7.62,50.54
EPD_CS  (via drill 0.3)
  Top 0.15: v68.14,14.67 80.26,14.67 81.37,15.77 81.37,16.33 J1.12 | v22.64,42.92 20.84,44.72 20.84,44.93 U2.11 | v6.37,34.68 3.12,37.93 3.12,38.28 TP10.3V3
  Bottom 0.15: v68.14,14.67 39.89,42.92 v22.64,42.92 22.58,42.92 14.34,34.68 v6.37,34.68
EPD_DC  (via drill 0.3)
  Top 0.15: v81.92,15.64 81.92,16.33 J1.11 | v83.1,106.21 82.13,107.18 TP11.3V3 | v13.78,43.89 13.23,44.44 13.23,44.93 U2.5
  Bottom 0.15: v81.92,15.64 82.55,15.64 83.65,16.74 85.39,16.74 90.72,22.08 90.72,47.14 | 90.72,47.14 90.72,98.6 v83.1,106.21 | v13.78,43.89 13.92,43.89 14.47,44.44 36.56,44.44 44.18,52.06 82.13,52.06 87.05,47.14 90.72,47.14
EPD_RST  (via drill 0.3)
  Top 0.15: v75,14.18 81.09,14.18 82.41,15.5 82.41,16.33 J1.10 | v52.49,2.2 18.91,2.2 TP12.3V3 19.25,2.27 v19.25,3.52 | v12.33,55.87 16.97,60.51 16.97,62.45 U2.21
  Bottom 0.15: v75,14.18 64.47,14.18 v52.49,2.2 | v12.33,55.87 8.1,51.65 8.1,38.7 4.02,34.61 4.02,18.75 v19.25,3.52
FLASH_CS
  Top 0.15: U1.1 36.29,54.69 24.38,54.69 22.09,52.41 22.09,45 U2.12
GDR  (via drill 0.3)
  Top 0.15: v85.39,17.78 86.36,16.81 86.36,16.4 J1.2 | v69.6,20.14 69.11,20.14 67.93,18.96 R4.1 67.86,18.89 67.73,18.89 65.72,16.88 63.5,16.88 62.81,17.57 62.6,17.57 Q3.1
  Bottom 0.15: v85.39,17.78 84.97,17.78 82.61,20.14 v69.6,20.14
GND  (via drill 0.3)
  Top 0.15: U1.9 40.16,52.82 38.3,50.95 36.36,50.95 U1.4 36.29,50.88 36.29,47.21 D9.1 36.36,47.08 36.36,46.94 37.05,46.24 37.05,45.07 35.42,43.44 | U2.29_3 12.6,53.52 13.78,53.52 U2.29_6 13.85,53.52 15.03,53.52 U2.29_9 | U2.29_1 12.6,51.02 12.6,52.2 U2.29_2 12.67,52.2 13.78,52.2 U2.29_5 | U2.29_1 12.67,51.02 13.78,51.02 U2.29_4 13.85,51.02 15.03,51.02 U2.29_7 15.1,51.02 15.1,52.2 U2.29_8 15.1,52.27 15.1,53.45 U2.29_9 | U2.29_1 12.53,50.95 8.1,46.52 U2.1 8.1,44.93 8.1,44.72 8.79,44.03 9.42,44.03 13.5,39.94 31.92,39.94 35.42,43.44 | 48.41,102.2 49.1,102.2 50.07,101.23 C_DELAY.2 | 48.41,102.2 47.71,102.2 47.58,102.06 47.58,101.78 45.91,100.12 45.84,100.12 45.5,99.77 IC1.3 | 48.41,107.67 50.69,107.67 BOOT_BUTTON.2 50.76,107.67 50.83,107.6 52.22,107.6 C6.2 52.28,107.6 52.98,107.6 53.18,107.81 60.18,107.81 60.25,107.88 61.98,107.88 62.26,107.6 CHANGE_BUTTON.1 62.33,107.6 65.79,107.6 CHANGE_BUTTON.2 65.86,107.53 65.93,107.46 67.45,107.46 C10.2 | 48.41,107.67 47.3,107.67 BOOT_BUTTON.1 47.23,107.74 46.54,107.74 46.12,108.15 45.08,108.15 44.25,107.32 27.42,107.32 C5.2 27.35,107.39 25.97,107.39 25.83,107.53 RESET_BUTTON.2 25.76,107.6 22.3,107.6 RESET_BUTTON.1 22.23,107.6 21.68,107.6 21.33,107.94 12.33,107.94 7.79,103.41 | v48.41,106.28 48.41,102.2 | v48.41,107.6 48.41,107.67 | 8.03,63.63 8.03,75.61 1.32,82.32 J4.G3 1.32,82.39 1.32,90.01 3.95,92.64 3.95,92.71 | 8.03,63.63 8.03,62.52 U2.28 | J4.G1 15.58,85.37 15.58,86.41 16.34,87.17 16.34,90.22 15.58,90.98 J4.G2 12.81,93.75 12.81,98.39 D11.1 12.74,98.46 v9.7,101.5 | 3.95,92.71 4.92,92.71 J4.P6
  Top 0.15: 3.95,92.71 2.29,94.37 2.29,95.48 J4.G4 2.29,95.55 2.29,97.77 6.03,101.5 6.03,101.64 C9.2 6.09,101.71 7.79,103.41 | v7.83,103.38 7.79,103.41 | v15.72,56.22 15.03,55.52 15.03,53.58 U2.29_9 | 8.03,63.63 v8.31,63.63 | TP4.3V3 162.6,64.94 162.67,64.87 167.93,64.87 TP5.3V3 168,64.8 168,59.33 J2.MP2 | J2.MP2 168.83,59.26 165.02,59.26 J2.MP4 164.95,59.19 164.4,58.64 164.4,57.53 J2.A12 164.4,57.46 164.4,57.19 J2.B1 164.33,57.12 155.95,57.12 153.67,54.83 153.67,52.82 | v151.73,45.55 151.8,45.62 151.8,46.31 C4_USB.2 | C5_USB.2 153.18,47.7 v153.8,47.08 161.77,47.08 164.33,49.64 J2.MP3 | v151.52,50.68 150.76,51.44 150.55,51.44 D1.1 | J2.B12 164.4,51.02 164.4,50.81 J2.A1 164.4,50.74 164.4,49.64 164.95,49.08 J2.MP3 | J2.MP3 165.02,49.01 168.83,49.01 J2.MP1 168.9,49.08 168.9,59.19 J2.MP2 | 124.86,49.36 124.86,50.12 125.62,50.88 128.81,50.88 C2_BAT.2 | 124.86,49.36 125.34,48.88 125.62,48.88 U5.2 | 121.39,39.94 121.39,44.3 120.91,44.79 R2_BAT.1 120.84,44.86 120.15,45.55 120.15,46.52 121.12,47.49 121.12,47.91 C1_BAT.2 121.19,47.98 v122.02,48.81 | 121.39,39.94 121.39,38.28 120.77,37.66 120.7,37.66 120.29,37.24 IC4.3 120.22,37.17 v118,37.17 | 121.39,39.94 127.77,39.94 128.46,39.25 129.77,39.25 C1_BAT2.2 | v124.1,49.36 124.86,49.36 | U4.9 133.51,51.23 133.51,51.09 132.96,50.54 132.61,50.54 U4.4 132.47,50.47 v131.37,49.36 | U4.6 134.48,51.02 133.51,51.02 U4.9 | U4.1 132.61,51.92 132.96,51.92 133.58,51.3 U4.9 | 153.67,52.82 154.5,52.82 154.57,52.89 R2-USB1.1 | 153.67,52.82 147.02,52.82 R2-USB2.2 146.95,52.75 134.41,52.75 133.31,51.65 U4.9 | 69.25,38.77 56.02,38.77 D6.1 55.95,38.77 53.67,38.77 D8.1 53.6,38.7 52.42,37.52 49.38,37.52 48.82,38.07 48.82,38.7 D12.1 48.75,38.77 v47.99,39.53
  Top 0.15: 69.25,38.77 72.57,38.77 84.21,50.4 84.21,50.68 U3.13 | C8.2 91.2,52.06 91.41,52.06 93.14,53.79 94.73,53.79 94.87,53.65 94.87,51.58 93.97,50.68 C10_SUPERCAP.2 93.97,50.61 106.71,37.86 115.58,37.86 R1_PWRUSB.1 115.65,37.8 v116.27,37.17 | 82.2,13.77 82.55,13.42 83.24,13.42 83.65,13.84 87.88,13.84 J1.MP1 87.95,13.9 87.95,19.93 89.19,21.18 89.19,22.28 88.57,22.91 EDP_C5.2 | 82.2,13.77 82.2,14.04 83.38,15.22 83.38,16.33 J1.8 | 67.55,11.79 66.34,10.58 R2.1 66.27,10.51 66.13,10.37 63.16,10.37 62.33,11.2 62.33,11.41 SJ1.1 | 67.55,11.79 69.6,13.84 74.37,13.84 J1.MP2 74.44,13.84 74.58,13.7 75.14,13.7 75.21,13.77 82.2,13.77 | 67.55,11.79 65.72,13.63 63.85,13.63 C7.2 | C2.2 149.44,7.05 150.83,7.05 C1.2 150.83,7.12 150.83,10.3 151.38,10.86 151.38,11.06 SENSOR2.7 151.45,11.13 151.45,11.41 151.87,11.83 | 151.87,11.83 152.49,11.83 152.97,11.34 152.97,11.13 SENSOR2.5 | 151.87,11.83 151.87,11.9 150.62,13.14 150.62,13.97 SENSOR2.1 150.62,14.04 150.62,14.67 | 150.62,14.67 153.67,17.71 J3.1 | 69.32,26.79 69.32,26.02 EDP_C1.2 | 69.32,26.79 EDP_C2.2 | R4.2 67.93,20.21 67.93,21.24 69.94,23.25 D10.1 69.94,23.32 v69.25,24.02 | v69.25,26.79 69.32,26.79 | J1.17 78.94,16.4 78.94,21.11 79.08,21.24 79.08,22.21 78.39,22.91 EDP_C10.2 78.32,22.98 76.38,22.98 EDP_C11.2 76.31,22.98 74.31,22.98 EDP_C12.2 74.24,22.91 73.82,22.49 v73.47,22.49 | EDP_C5.2 88.5,22.98 87.19,21.66 86.56,21.66 EDP_C6.2 86.49,21.66 85.25,22.91 84.48,22.91 EDP_C7.2 84.42,22.98 82.48,22.98 EDP_C8.2 82.41,22.98 80.47,22.98 EDP_C9.2 80.47,23.05 80.19,23.32 v80.19,23.67 | 92.38,33.64 92.24,33.78 91.13,33.78 90.51,33.16 90.16,33.16 D3.1
  Top 0.15: 92.38,33.64 92.38,26.92 88.5,23.05 EDP_C5.2 | 116.51,34.58 115.58,33.64 92.38,33.64 | 116.51,34.58 117.31,35.37 117.52,35.37 C1_BAT1.2 117.59,35.44 126.38,35.44 126.59,35.65 C3.- 126.66,35.65 147.64,14.67 150.62,14.67 | v116.48,34.61 116.51,34.58 | v69.25,34.26 69.25,38.77 | v35.52,43.4 35.46,43.4 35.42,43.44
  Bottom 0.15: v48.41,107.6 v48.41,106.28 | v7.83,103.38 v9.7,101.5 | v8.31,63.63 v15.72,56.22 | v151.73,45.55 152.28,45.55 153.63,46.9 | v153.8,47.08 153.63,46.9 | v151.52,50.68 151.52,50.05 151.17,49.71 151.17,49.36 153.63,46.9 | v122.02,48.81 122.57,49.36 v124.1,49.36 v131.37,49.36 | v80.19,23.67 79.01,22.49 v73.47,22.49 71.95,24.02 v69.25,24.02 v69.25,26.79 v69.25,34.26 | v116.48,34.61 116.27,34.82 v116.27,37.17 v118,37.17 | v35.52,43.4 44.11,43.4 v47.99,39.53
  pour Top: -19.12,-32.82 176.92,-32.82 176.92,141.82 -19.12,141.82
  pour Bottom: -9.72,-10.62 186.12,-10.62 186.12,116.22 -9.72,116.22
GPIO8
  Top 0.15: R1.2 19.46,41.81 19.46,44.93 U2.10
I2C_PW  (via drill 0.3)
  Top 0.15: 153.01,10.06 152.21,10.86 152.21,11.06 SENSOR2.6 | 153.01,10.06 155.12,7.95 155.12,5.94 154.29,5.11 148.96,5.11 148.75,5.32 148.75,7.46 150.55,9.26 150.55,11.06 SENSOR2.8 150.48,11.06 v150,11.55 | 153.01,10.06 153.53,10.58 153.53,11.62 151.45,13.7 151.45,13.97 SENSOR2.2 | v22.85,63.63 22.09,62.86 22.09,62.52 U2.17 | v114.82,38.49 v89.68,63.63
  Bottom 0.15: v89.68,63.63 v22.85,63.63 | v114.82,38.49 123.06,38.49 v150,11.55
INT_RTC  (via drill 0.3)
  Top 0.15: v87.19,47.63 86.63,48.18 86.63,48.32 R1-PINH1.1 | v85.52,58.64 85.52,59.95 U3.3 | v17.8,46.1 17.04,45.34 17.04,45 U2.8 | v87.88,66.33 87.88,107.18 TP15.3V3
  Bottom 0.15: 87.19,48.6 v87.19,47.63 | 87.19,48.6 87.95,49.36 87.95,56.22 86.53,57.63 | v85.52,58.64 86.53,57.63 | v17.8,46.1 27.42,46.1 28.81,44.72 36.42,44.72 44.04,52.34 83.38,52.34 87.12,48.6 87.19,48.6 | v87.88,66.33 87.88,66.05 90.16,63.76 90.16,61.27 86.53,57.63
IO/BOOT  (via drill 0.3)
  Top 0.15: C6.1 51.04,108.85 50.76,109.12 BOOT_BUTTON.3 50.69,109.19 47.3,109.19 BOOT_BUTTON.4 47.23,109.12 46.95,108.85 45.64,108.85 R_BOOT.2 45.57,108.78 45.22,108.43 v44.74,108.43 | v24.65,75.67 24.65,62.52 U2.15
  Bottom 0.15: v24.65,75.67 24.65,88.35 v44.74,108.43
IO/CHANGE  (via drill 0.3)
  Top 0.15: C10.1 67.45,108.71 66.2,108.71 65.86,109.05 CHANGE_BUTTON.3 65.79,109.12 62.33,109.12 CHANGE_BUTTON.4 62.26,109.05 61.84,108.64 60.8,108.64 R_CHANGE.2 60.73,108.57 60.45,108.29 v59.97,108.29 | v24.17,72.49 14.47,62.79 14.47,62.52 U2.23
  Bottom 0.15: v59.97,108.29 v24.17,72.49
MISO  (via drill 0.3)
  Top 0.15: v23.55,53.24 23.75,53.45 36.29,53.45 U1.2 | v9.42,61.27 9.42,62.45 U2.27 | v3.95,93.33 4.29,93.68 5.05,93.68 J4.P7 | v3.12,27.89 3.12,24.85 TP6.3V3
  Bottom 0.15: v23.55,53.24 17.45,53.24 12.91,57.77 | 12.91,57.77 v9.42,61.27 9.42,61.34 3.46,67.3 3.46,80.45 3.95,80.94 v3.95,93.33 | v3.12,27.89 3.12,40.36 6.86,44.1 6.86,51.72 12.91,57.77
MOSI  (via drill 0.3)
  Top 0.15: v70.36,15.15 79.5,15.15 80.33,15.98 80.33,16.33 J1.14 | v44.32,50.33 44.32,50.68 44.11,50.88 U1.5 | v18.91,43.89 16.55,43.89 15.72,44.72 15.72,44.93 U2.7 15.72,45.07 15.72,45.27 17.66,47.21 17.66,48.81 25.28,56.42 25.28,75.67 24.79,76.16 22.85,76.16 9.7,89.32 5.12,89.32 J4.P3 | v5.89,32.12 3.12,29.35 TP7.3V3
  Bottom 0.15: v70.36,15.15 50,35.51 50,44.65 v44.32,50.33 44.25,50.33 37.81,43.89 v18.91,43.89 18.84,43.89 15.51,40.56 11.63,40.56 5.89,34.82 v5.89,32.12
N$1
  Top 0.15: R2-USB1.2 154.63,54.21 161.91,54.21 163.22,52.89 164.33,52.89 J2.A5
N$3  (via drill 0.3)
  Top 0.15: v148.47,51.51 147.02,51.51 R2-USB2.1 | v163.43,55.45 163.84,55.87 164.33,55.87 J2.B5
  Bottom 0.15: v148.47,51.51 159.48,51.51 v163.43,55.45
N$4
  Top 0.15: 87.19,32.53 90.79,32.53 91.48,33.23 91.62,33.23 C4.1 | 87.19,32.53 86.63,33.09 D3.2 | D4.1 86.49,29.07 86.49,31.77 87.19,32.46 87.19,32.53
N$5  (via drill 0.3)
  Top 0.15: v82.68,13.9 82.68,14.11 83.31,14.73 84.07,14.73 85.32,15.98 85.32,16.33 J1.4 | v67.38,25.75 67.86,25.75 68.07,25.95 EDP_C1.1
  Bottom 0.15: v82.68,13.9 75.9,13.9 70.77,19.03 66.89,19.03 66.55,19.38 66.55,24.91 v67.38,25.75
N$6  (via drill 0.3)
  Top 0.15: v85.59,18.75 84.9,18.06 84.9,16.4 J1.5 | v68.7,27.13 EDP_C2.1
  Bottom 0.15: v85.59,18.75 84.83,18.75 82.06,21.52 73.13,21.52 71.12,23.53 69.11,23.53 68.7,23.95 v68.7,27.13
N$7  (via drill 0.3)
  Top 0.15: v78.25,17.99 78.39,17.85 78.39,16.4 J1.18 | v87.19,22.28 86.56,22.91 EDP_C6.1
  Bottom 0.15: v78.25,17.99 77.77,17.99 77.42,17.64 77.42,17.37 77.77,17.02 85.25,17.02 87.19,18.96 v87.19,22.28
N$8  (via drill 0.3)
  Top 0.15: v77.91,17.5 77.91,16.4 J1.19 | v82.48,19.65 84.42,21.59 EDP_C7.1
  Bottom 0.15: v77.91,17.5 80.33,17.5 v82.48,19.65
N$9  (via drill 0.3)
  Top 0.15: v78.46,18.82 77.42,17.78 77.42,16.4 J1.20 | v80.47,19.65 82.41,21.59 EDP_C8.1
  Bottom 0.15: v78.46,18.82 79.64,18.82 v80.47,19.65
N$10  (via drill 0.3)
  Top 0.15: v118.21,36.06 118.14,36.13 117.1,36.13 116.41,35.44 116.27,35.44 C1_BAT1.1 | v119.39,37.66 119.59,37.66 120.08,38.14 120.22,38.14 IC4.2
  Bottom 0.15: v118.21,36.06 118.21,36.48 v119.39,37.66
N$11
  Top 0.15: J1.22 76.38,19.65 78.32,21.59 EDP_C10.1
N$12  (via drill 0.3)
  Top 0.15: D2.2 117.17,39.46 117.45,39.18 120.22,39.18 IC4.1 120.29,39.18 v120.91,39.8 | v130.33,45.83 130.74,46.24 130.74,46.8 Q1.3
  Bottom 0.15: v130.33,45.83 126.94,45.83 v120.91,39.8
N$13
  Top 0.15: IC1.5 48.27,101.58 48.41,101.58 50.07,99.91 C_DELAY.1
N$14  (via drill 0.3)
  Top 0.15: v117.86,48.32 116.48,49.71 R1_BAT.1 | v124.72,48.32 125.2,48.32 125.62,47.91 U5.1
  Bottom 0.15: v124.72,48.32 v117.86,48.32
N$15
  Top 0.15: CHG_LED.C 119.87,49.71 117.72,49.71 R1_BAT.2
N$16
  Top 0.15: D7.2 88.57,65.15 88.57,63.21 R_CAPACITOR.2
N$17
  Top 0.15: J1.24 75.34,16.4 75.34,20.55 74.31,21.59 EDP_C12.1
N$18
  Top 0.15: R2_BAT.2 120.91,46.17 121.39,46.17 123.06,47.84 U5.5
N$19  (via drill 0.3)
  Top 0.15: v49.51,35.65 48.82,34.96 R8.1 | v49.51,38 49.51,39.53 48.82,40.22 D12.2
  Bottom 0.15: v49.51,38 v49.51,35.65
N$21  (via drill 0.3)
  Top 0.15: v71.61,20.62 68.14,17.16 68.14,16.81 R6.1 | v71.61,22.42 71.61,23.18 71.53,23.25 D10.2
  Bottom 0.15: v71.61,22.42 v71.61,20.62
N$22  (via drill 0.3)
  Top 0.15: v8.59,101.92 8.38,101.71 7.83,101.71 R7.1 | v11.22,99.29 11.22,98.53 11.29,98.46 D11.2
  Bottom 0.15: v11.22,99.29 v8.59,101.92
N$23
  Top 0.15: R5.1 34.83,45.76 36.22,45.76 36.29,45.69 D9.2
N$25  (via drill 0.3)
  Top 0.15: v55.26,35.65 55.95,34.96 R9.1 | v55.26,39.53 55.95,40.22 D6.2
  Bottom 0.15: v55.26,39.53 v55.26,35.65
N$26  (via drill 0.3)
  Top 0.15: v54.36,35.65 53.67,34.96 R10.1 | v54.36,39.53 53.67,40.22 D8.2
  Bottom 0.15: v54.36,39.53 v54.36,35.65
PREVGH  (via drill 0.3)
  Top 0.15: v78.46,20.62 76.94,19.1 76.94,16.4 J1.21 | v80.19,20.9 80.19,21.38 80.4,21.59 EDP_C9.1 | v79.5,33.85 79.5,35.79 D5.1
  Bottom 0.15: v78.46,20.62 79.92,20.62 v80.19,20.9 82.27,20.9 84.9,18.27 85.73,18.27 86.08,18.61 86.08,22.77 79.5,29.35 v79.5,33.85
PREVGL  (via drill 0.3)
  Top 0.15: J1.23 75.9,16.4 75.9,21.18 76.31,21.59 EDP_C11.1 76.38,21.66 76.73,22.01 v77.14,22.01 | v84.55,23.67 89.89,29 D4.2
  Bottom 0.15: v84.55,23.67 80.81,23.67 79.15,22.01 v77.14,22.01
RESE  (via drill 0.3)
  Top 0.15: v83.45,14.25 84.14,14.25 85.87,15.98 85.87,16.33 J1.3 | v67.03,19.51 66.34,20.21 R3.2 66.34,20.14 63.85,17.64 Q3.2
  Bottom 0.15: v83.45,14.25 82.96,14.25 82.06,15.15 75.07,15.15 70.84,19.38 67.17,19.38 v67.03,19.51
RESE'  (via drill 0.3)
  Top 0.15: R2.2 66.27,11.83 64.19,11.83 63.85,11.48 SJ1.2 63.85,11.55 62.6,12.8 v62.46,12.8 | v64.82,17.37 66.27,18.82 R3.1
  Bottom 0.15: v64.82,17.37 64.82,15.15 v62.46,12.8
RESET  (via drill 0.3)
  Top 0.15: R_RESET.2 20.84,108.71 21.88,108.71 22.23,109.05 RESET_BUTTON.4 22.37,109.05 25.76,109.05 RESET_BUTTON.3 25.83,109.05 27.01,109.05 27.35,108.71 C5.1 27.42,108.57 v28.18,107.81 | v34.35,101.64 45.43,101.64 IC1.1 | v16.41,56.98 16.41,51.23 10.66,45.48 10.66,45 U2.3
  Bottom 0.15: v28.18,107.81 v34.35,101.64 34.35,101.58 16.41,83.64 v16.41,56.98
RTC_RST  (via drill 0.3)
  Top 0.15: v24.17,64.59 23.34,63.76 23.34,62.52 U2.16 | v79.98,64.59 84.21,60.37 84.21,60.02 U3.4
  Bottom 0.15: v79.98,64.59 v24.17,64.59
RX  (via drill 0.3)
  Top 0.15: v12.33,56.49 13.16,57.32 13.16,62.45 U2.24 | v3.6,36.06 1.87,34.33 1.87,11.83 11.49,2.2 TP2.3V3
  Bottom 0.15: v12.33,56.49 7.13,51.3 7.13,39.6 v3.6,36.06
SCK  (via drill 0.3)
  Top 0.15: v80.61,15.64 80.81,15.84 80.81,16.33 J1.13 | U1.6 44.11,52.2 44.32,51.99 v44.32,51.58 43.77,51.58 37.33,45.14 37.33,44.58 32.41,39.66 13.16,39.66 v11.77,41.05 | v3.95,80.31 3.95,90.91 4.57,91.53 5.05,91.53 J4.P5 | v17.38,53.93 17.38,48.18 14.47,45.27 14.47,45 U2.6 14.4,44.93 v14.4,43.75 | v4.5,33.85 3.48,33.85 TP8.3V3
  Bottom 0.15: v80.61,15.64 75,15.64 70.98,19.65 69.46,19.65 67.86,21.24 67.86,28.03 v44.32,51.58 | v3.95,80.31 3.95,67.36 v17.38,53.93 | v14.4,43.75 11.74,41.09 | 11.74,41.09 v4.5,33.85 | v11.77,41.05 11.74,41.09
SCL  (via drill 0.3)
  Top 0.15: v135.25,50.19 135.25,51.09 134.9,51.44 134.55,51.44 U4.7 | v164.19,21.24 164.75,21.24 165.23,20.76 J3.4 | v154.63,6.56 153.8,5.73 R2-PINH.1 | v154.98,12.03 153.04,13.97 SENSOR2.4 | v88.71,57.12 91.2,59.61 R2-PINH1.1 | U3.16 88.09,50.74 88.29,50.95 v88.71,50.95 88.78,50.95 89.54,50.19 v91.89,50.19 | v22.3,66.81 18.28,62.79 18.28,62.52 U2.20
  Bottom 0.15: v154.63,6.56 154.63,11.62 155.02,12 | 155.02,12 164.19,21.18 v164.19,21.24 v135.25,50.19 v91.89,50.19 | v154.98,12.03 155.02,12 | v88.71,50.95 v88.71,57.12 88.71,57.19 90.44,58.92 90.44,64.39 88.02,66.81 v22.3,66.81
SDA  (via drill 0.3)
  Top 0.15: v135.73,45.34 135.73,51.09 134.9,51.92 134.55,51.92 U4.8 | v151.52,14.94 152.14,14.32 152.14,14.04 SENSOR2.3 152.21,14.32 152.63,14.73 163.57,14.73 166.13,17.3 166.13,19.1 165.58,19.65 165.3,19.65 J3.3 | v153.11,6.36 153.04,6.36 152.42,5.73 R1-PINH.1 | v19.25,61.34 19.46,61.55 19.46,62.45 U2.19 | U3.15 86.77,50.68 87.46,49.98 v87.46,49.5 87.46,49.43 87.88,49.43 91,46.31 v91.2,46.31
  Bottom 0.15: v153.11,6.36 153.11,13.28 151.52,14.87 v151.52,14.94 135.73,30.73 v135.73,45.34 131.44,45.34 130.47,46.31 v91.2,46.31 | v19.25,61.34 75.62,61.34 v87.46,49.5
SRC  (via drill 0.3)
  Top 0.15: C4.2 91.62,34.47 80.75,34.47 79.29,33.02 77.77,33.02 L1.1 | v69.73,24.64 69.25,24.64 64.33,19.72 63.23,19.72 Q3.3 | v77.21,31.92 77.21,32.46 77.7,32.95 L1.1 | D5.2 75.97,35.79 75.97,34.89 77.77,33.09 L1.1
  Bottom 0.15: v77.21,31.92 69.94,24.64 v69.73,24.64
SS_SD  (via drill 0.3)
  Top 0.15: v16.9,57.46 16.9,51.3 11.91,46.31 U2.4 | v16.9,76.85 5.54,88.21 J4.P2
  Bottom 0.15: v16.9,76.85 v16.9,57.46
TX  (via drill 0.3)
  Top 0.15: v11.84,54.76 11.84,62.45 U2.25 | v5.19,35.16 3.81,36.55 3.46,36.55 1.59,34.68 1.59,8.09 7.48,2.2 TP1.3V3
  Bottom 0.15: v11.84,54.76 11.84,41.81 v5.19,35.16
USB_D+  (via drill 0.3)
  Top 0.15: v147.85,49.01 151.73,49.01 152.21,49.5 152.97,49.5 D1.4 | v120.22,65.84 49.58,65.84 v44.6,60.85 | v28.95,45.2 24.86,45.2 24.65,45 U2.14
  Bottom 0.15: v147.85,49.01 137.05,49.01 v120.22,65.84 | v28.95,45.2 v44.6,60.85
USB_D-  (via drill 0.3)
  Top 0.15: v149.03,50.54 150.48,50.54 D1.2 | v89.06,64.11 v122.57,64.11 | v24.03,46.59 24.03,45.97 23.34,45.27 U2.13
  Bottom 0.15: v149.03,50.54 136.15,50.54 v122.57,64.11 | v89.06,64.11 21.4,64.11 18.77,61.48 18.77,58.64 24.03,53.38 v24.03,46.59
VBAT
  Top 0.3: U4.2 132.54,51.44 132.54,51.02 U4.3 132.41,50.95 131.99,50.95 | 129.77,48.67 129.77,44.72 Q1.1 | 129.77,48.67 128.87,49.57 C2_BAT.1 128.74,49.71 125.69,49.71 U5.3 | 131.99,50.95 129.84,48.81 129.77,48.67 | TP3.3V3 138.92,64.8 138.92,59.26 131.85,52.2 131.85,51.02 131.99,50.95
VBUS
  Top 0.3: C5_USB.1 151.94,47.7 151.94,47.56 153.11,46.38 C4_USB.1 153.04,46.24 153.04,44.1 152.97,44.03 PFMF.050.1.2 152.84,43.89 150.76,41.81 147.5,41.81 147.29,42.02 147.29,44.79 | 147.29,44.79 147.29,49.57 149.79,52.06 151.24,52.06 151.8,51.51 152.97,51.51 D1.6 | D2.1 117.1,37.45 117.1,37.66 115.65,39.11 R1_PWRUSB.2 115.72,39.25 115.72,43.75 119.8,47.84 C1_BAT.1 119.94,47.98 119.94,48.18 121.33,49.57 CHG_LED.A 121.47,49.71 123.06,49.71 U5.4 | U5.4 123.13,49.57 124.03,48.67 124.03,48.18 128.25,43.96 130.33,43.96 131.02,44.65 131.71,44.65 Q1.2 131.85,44.79 147.29,44.79 | TP14.3V3 133.72,64.8 133.72,60.37 123.2,49.84 U5.4
VRTC
  Top 0.3: C10_SUPERCAP.1 93.9,52.82 91.89,50.81 91.2,50.81 C8.1 91,50.81 89.61,50.81 88.36,52.06 86.08,52.06 | 86.08,52.06 86.08,51.3 85.52,50.74 U3.14 | 86.08,52.06 86.08,61.06 87.25,62.24 87.25,63.14 R_CAPACITOR.1
VUSB
  Top 0.3: J2.A9 164.4,56.63 164.4,56.42 J2.B4 164.54,56.35 165.09,56.35 165.3,56.15 165.3,52.13 165.09,51.92 164.54,51.92 J2.B9 164.4,51.85 164.4,51.65 J2.A4 164.26,51.51 156.3,51.51 153.32,48.53 151.38,48.53 148.4,45.55 148.4,43.96 PFMF.050.1.1